# EAGLE board serial-max3232 (EAGLE 5.02)
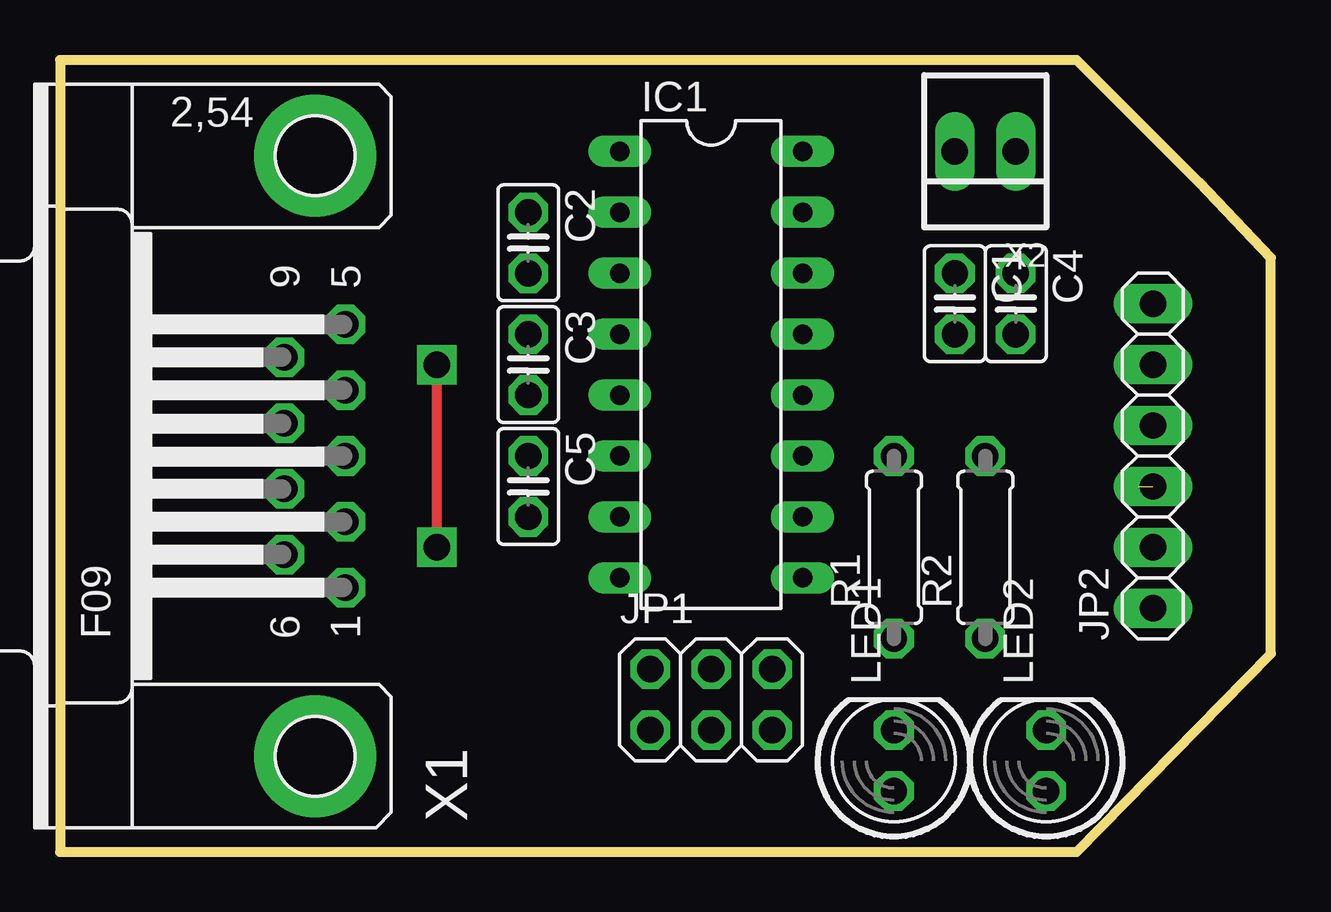
[diagram p0: board, top side]
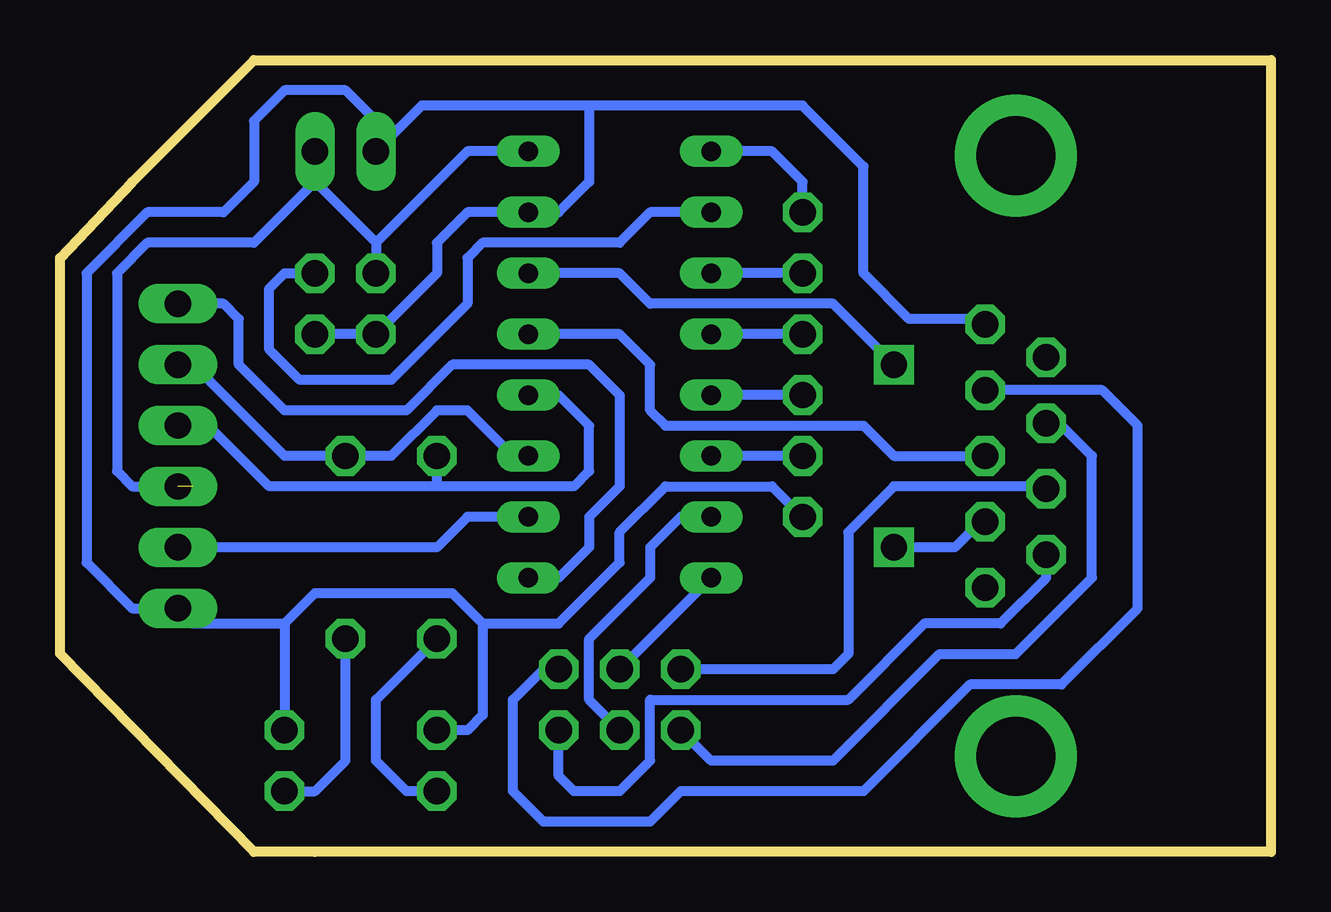
[diagram p1: board, bottom side, seen from below]

Size 50.47 x 33.02 mm. Coordinates in mm from the lower left corner, seen from the top.
Outline: 0,0.01 39.84,0 42.38,0.01 50.47,8.26 50.47,24.76 47.46,27.93 42.38,33.02 0,33.02 0,0.01
Copper layers (1*16): Top 0.035mm / dielectric 1.5mm / Bottom 0.035mm
Design rules "default": minimum track width 10mil, minimum drill 24mil, track to track 8mil, track to pad 8mil, pad to pad 8mil, via to via 8mil, smd to smd 8mil, copper to edge 40mil, drill to drill 8mil, minimum pad ring 10mil, minimum via ring 8mil, stop-mask expansion 4mil, vias tented up to drill 0mil, thermal gap 10mil

## Footprints (pad centres in the part's own frame; a part is rotated, then mirrored left to right if it is on the bottom)
C025-025X050 = drill 1.1 octagon: 1 -1.27,0; 2 1.27,0
DIL16 = drill 0.813 long: 1 -8.89,-3.81; 2 -6.35,-3.81; 3 -3.81,-3.81; 4 -1.27,-3.81; 5 1.27,-3.81; 6 3.81,-3.81; 7 6.35,-3.81; 8 8.89,-3.81; 9 8.89,3.81; 10 6.35,3.81; 11 3.81,3.81; 12 1.27,3.81; 13 -1.27,3.81; 14 -3.81,3.81; 15 -6.35,3.81; 16 -8.89,3.81
2X03 = drill 1.1 octagon: 1 -2.54,-1.27; 2 -2.54,1.27; 3 0,-1.27; 4 0,1.27; 5 2.54,-1.27; 6 2.54,1.27
1X06 = drill 1.1 long: 1 -6.35,0; 2 -3.81,0; 3 -1.27,0; 4 1.27,0; 5 3.81,0; 6 6.35,0
LED5MM = drill 1.1 octagon: A -1.27,0; K 1.27,0
0207/7 = drill 1.1 octagon: 1 -3.81,0; 2 3.81,0
F09HP = drill 1.1 octagon: 1 -5.486,-1.27; 2 -2.743,-1.27; 3 0,-1.27; 4 2.743,-1.27; 5 5.486,-1.27; 6 -4.115,1.27; 7 -1.372,1.27; 8 1.372,1.27; 9 4.115,1.27 | drill 3.302 pad 5.08 round: G1 -12.522,0; G2 12.522,0
22-23-2021 = drill 1.1 long: 1 -1.27,0; 2 1.27,0

## Placement (x,y rotation side)
C1  [C025-025X050]  37.3,22.86 270 top
C2  [C025-025X050]  19.52,25.4 270 top
C3  [C025-025X050]  19.52,20.32 270 top
C4  [C025-025X050]  39.84,22.86 270 top
C5  [C025-025X050]  19.52,15.24 270 top
IC1  MAX3232CPE  [DIL16]  27.14,20.32 270 top
JP1  [2X03]  27.14,6.35 0 top
JP2  [1X06]  45.55,16.51 90 top
LED1  [LED5MM]  34.76,3.81 90 top
LED2  [LED5MM]  41.11,3.81 90 top
R1  [0207/7]  34.76,12.7 90 top
R2  [0207/7]  38.57,12.7 90 top
X1  [F09HP]  10.63,16.51 90 top
X2  [22-23-2021]  38.57,29.21 180 top

## Library data of the parts
C1-C5 IC1 JP1 JP2 LED1 LED2 R1 R2 X1 X2 = serial

## Nets
+5V: C1.1 IC1.16 JP2.3 X2.1
CTS: JP1.1 X1.8
CTS/DSR: IC1.10 JP2.2
CTS/DSR-: IC1.7 JP1.3
DSR: JP1.5 X1.6
DTR: JP1.6 X1.4
GND: C1.2 C4.2 C5.2 IC1.15 JP2.1 LED1.K LED2.K X1.5 X2.2
N$1: C2.1 IC1.1
N$2: C2.2 IC1.3
N$3: C3.1 IC1.4
N$4: C3.2 IC1.5
N$5: C4.1 IC1.2
N$6: C5.1 IC1.6
N$7: IC1.14 X1.2
N$8: IC1.13 X1.3
N$9: LED1.A R1.1
N$10: LED2.A R2.1
RTS: JP1.2 X1.7
RTS/DTR: IC1.9 JP2.6
RTS/DTR-: IC1.8 JP1.4
RXD: IC1.11 JP2.5 R2.2
TXD: IC1.12 JP2.4 R1.2

## Tracks (layer width: path | path; a pad name or v marks a point on that pad's centre or on a via)
+5V  (1 unrouted)
  Bottom 0.406: IC1.16 33.49,29.21 37.3,25.4 | 37.3,25.4 C1.1 | 37.3,25.4 39.84,27.94 | 39.84,27.94 X2.1 | 39.84,27.94 42.38,25.4 46.83,25.4 48.1,24.13 48.1,15.88 47.46,15.24 JP2.3
CTS
  Bottom 0.406: JP1.1 23.33,3.81 18.25,3.81 13.8,8.26 10.63,8.26 7.46,11.43 7.46,16.51 8.72,17.78 9.36,17.78 X1.8
CTS/DSR
  Bottom 0.406: JP2.2 34.76,12.7 33.49,13.97 IC1.10
CTS/DSR-
  Bottom 0.406: JP1.3 28.41,6.35 28.41,8.89 25.87,11.43 25.87,12.7 24.6,13.97 IC1.7
DSR
  Bottom 0.406: JP1.5 29.68,3.17 29.04,2.54 27.14,2.54 25.87,3.81 25.87,6.35 17.61,6.35 14.44,9.53 11.26,9.53 9.36,11.43 X1.6
DTR
  Bottom 0.406: JP1.6 30.31,7.62 31.58,6.35 31.58,2.54 30.31,1.27 25.87,1.27 24.6,2.54 16.98,2.54 12.54,6.99 8.72,6.99 5.55,10.16 5.55,17.78 7.02,19.25 X1.4
GND
  Bottom 0.406: 28.41,31.11 35.4,31.11 X2.2 37.3,30.48 38.57,31.75 41.11,31.75 42.38,30.48 42.38,27.94 43.65,26.67 46.83,26.67 49.37,24.13 49.37,12.06 47.46,10.16 JP2.1 44.92,9.53 41.11,9.53 | 28.41,31.11 28.41,27.94 29.68,26.67 IC1.15 33.49,26.67 34.76,25.4 34.76,24.13 C1.2 C4.2 | C5.2 20.79,15.24 25.23,15.24 27.14,13.34 27.14,12.06 29.68,9.53 32.86,9.53 | 28.41,31.11 19.52,31.11 16.98,28.57 16.98,24.13 15.07,22.23 11.9,22.23 X1.5 11.9,21.59 | 41.11,9.53 39.84,10.79 34.12,10.79 32.86,9.53 | 41.11,9.53 LED2.K | LED1.K 33.49,5.08 32.86,5.71 32.86,9.53
N$1
  Bottom 0.406: C2.1 19.52,27.94 20.79,29.21 IC1.1
N$2
  Bottom 0.406: C2.2 IC1.3
N$3
  Bottom 0.406: C3.1 IC1.4
N$4
  Bottom 0.406: C3.2 IC1.5
N$5
  Bottom 0.406: IC1.2 25.87,26.67 27.14,25.4 32.86,25.4 33.49,24.77 33.49,22.86 36.67,19.68 40.48,19.68 41.75,20.95 41.75,23.5 41.11,24.13 C4.1
N$6
  Bottom 0.406: C5.1 IC1.6
N$7  (via drill 1.1)
  Top 0.406: v15.71,12.7 v15.71,20.32
  Bottom 0.406: IC1.14 27.14,24.13 25.87,22.86 18.25,22.86 v15.71,20.32 | X1.2 11.9,13.97 13.17,12.7 v15.71,12.7
N$8
  Bottom 0.406: IC1.13 27.14,21.59 25.87,20.32 25.87,18.41 25.23,17.78 16.98,17.78 15.71,16.51 X1.3
N$9
  Bottom 0.406: LED1.A 36.03,2.54 37.3,3.81 37.3,6.35 R1.1
N$10
  Bottom 0.406: LED2.A 39.84,2.54 38.57,3.81 R2.1
RTS
  Bottom 0.406: X1.7 9.36,15.24 15.71,15.24 17.61,13.34 17.61,8.26 18.25,7.62 JP1.2
RTS/DTR
  Bottom 0.406: 44.92,22.86 JP2.6 43.65,22.86 43.02,22.23 43.02,20.32 41.11,18.41 36.03,18.41 34.12,20.32 28.41,20.32 27.14,19.05 27.14,15.24 28.41,13.97 28.41,12.7 29.68,11.43 IC1.9
RTS/DTR-
  Bottom 0.406: IC1.8 JP1.4
RXD
  Bottom 0.406: IC1.11 31.58,16.51 33.49,18.41 34.76,18.41 36.67,16.51 R2.2 41.11,16.51 44.92,20.32 JP2.5
TXD
  Bottom 0.406: IC1.12 29.68,19.05 28.41,17.78 28.41,15.88 29.04,15.24 34.76,15.24 | JP2.4 44.29,17.78 41.75,15.24 34.76,15.24 | 34.76,15.24 R1.2